# Altium PCB BOARD.PcbDoc
Units mm, origin at the board's own origin, x right, y up, seen from the top; angles counter-clockwise.
Board outline 15.75 x 25.91 mm, 2 copper layers (Top Layer, Bottom Layer); 4 components, 10 nets, 34 pads, 7 vias.
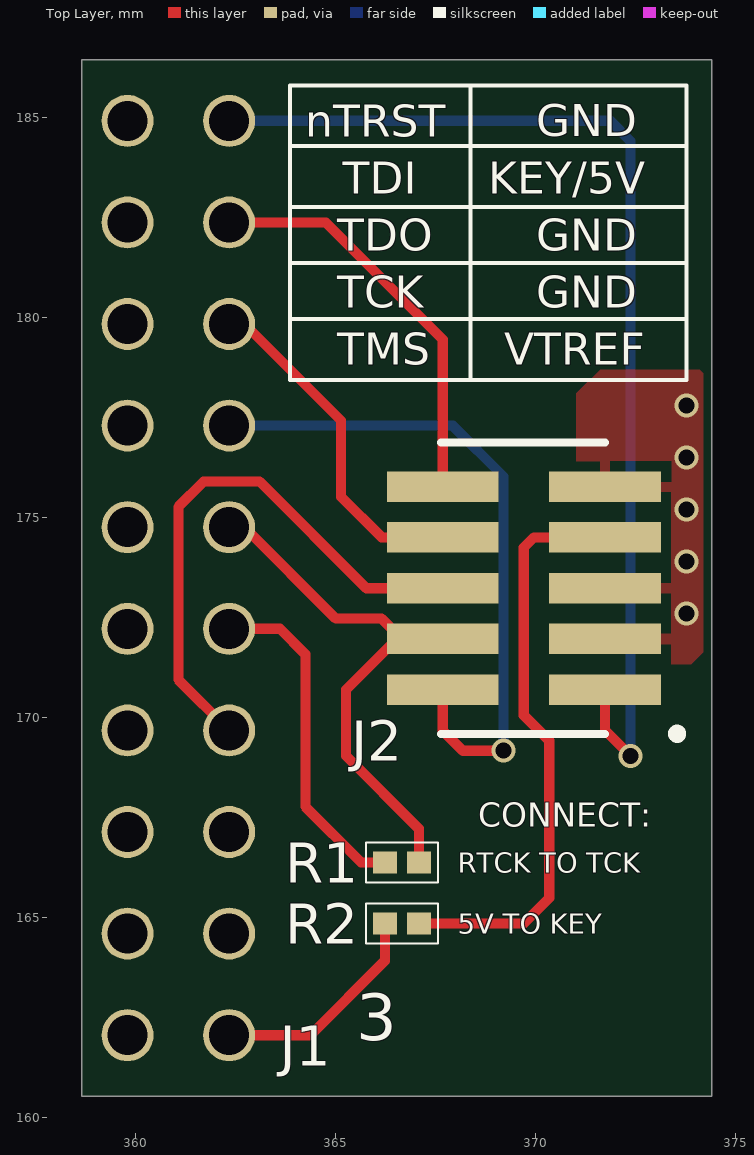
[diagram p0: Top Layer view]
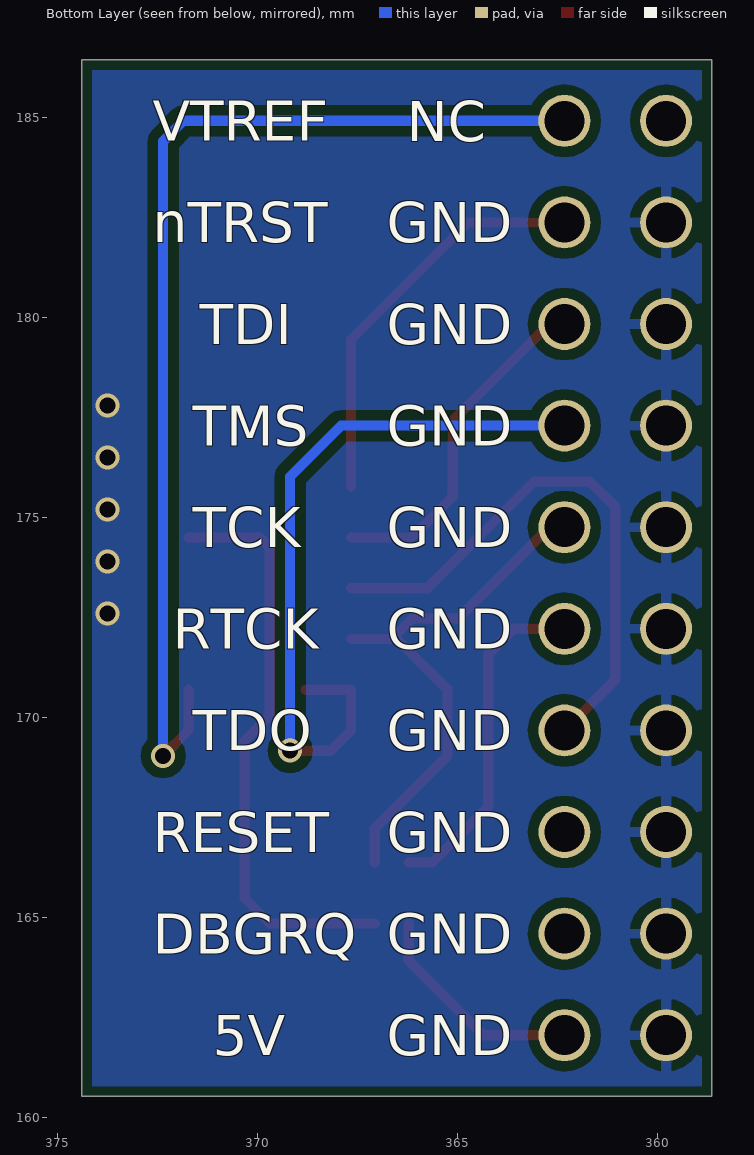
[diagram p1: Bottom Layer view, seen from below]
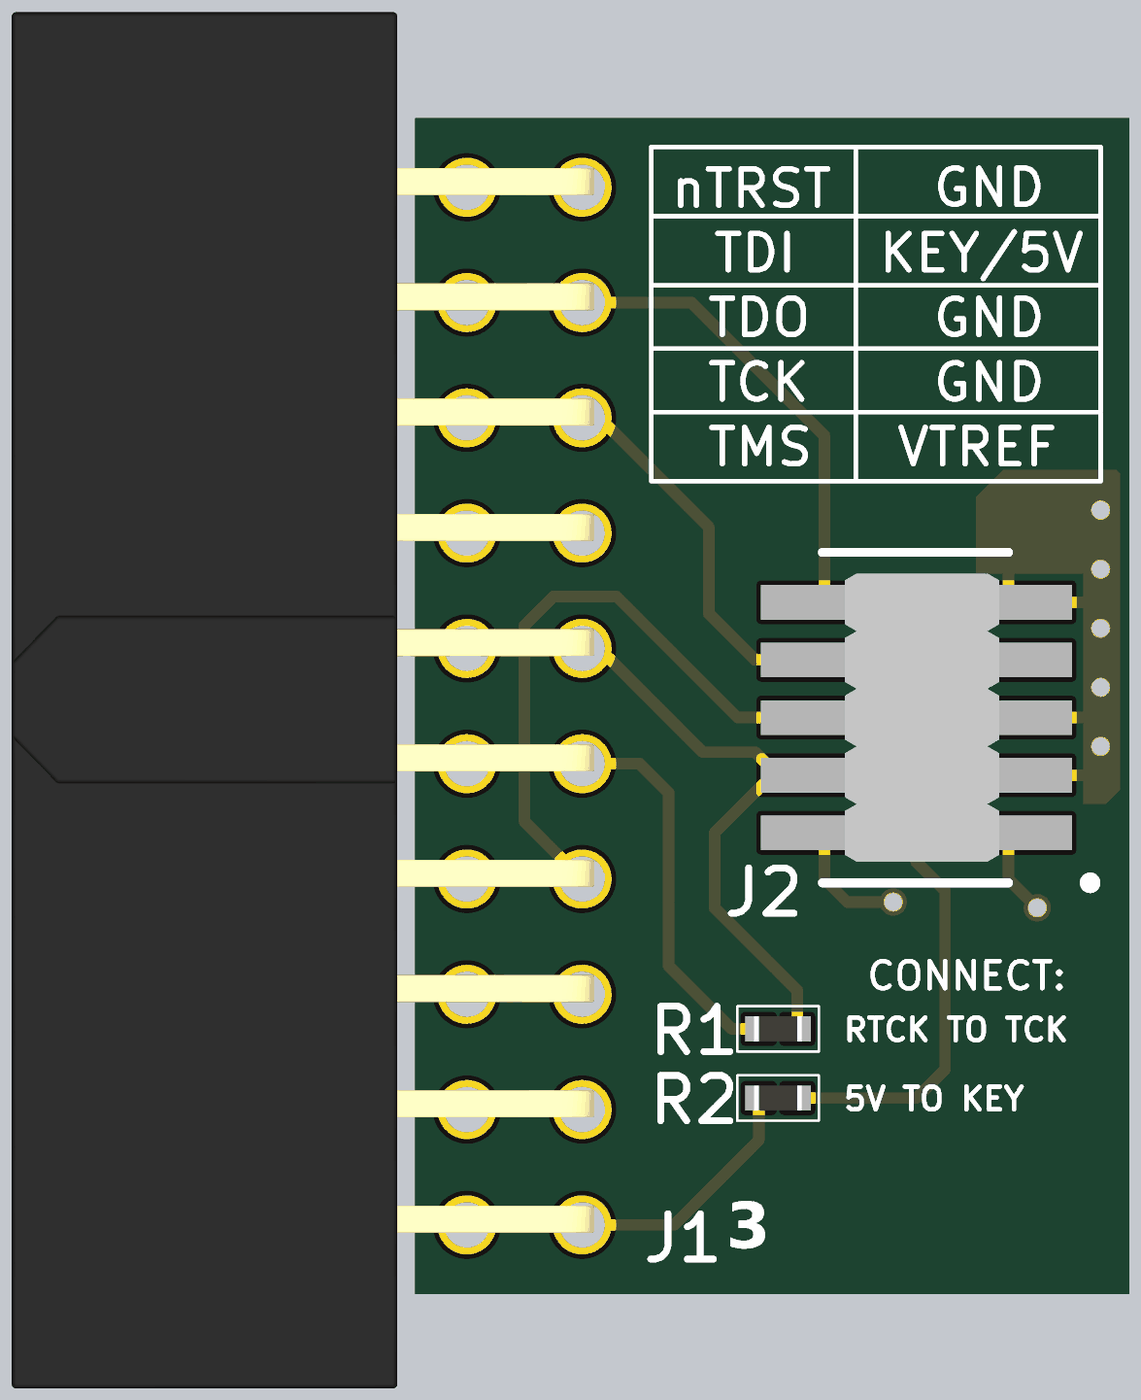
[diagram p2: 3D render of the assembled board from above, using the file's embedded part models]

## Layer stack, top to bottom
Top Solder: solder mask 0.0102, Solder Resist, Dk 3.5
Top Layer: signal copper 0.0356
Dielectric 1: dielectric 0.32, FR-4, Dk 4.8
Bottom Layer: signal copper 0.0356
Bottom Solder: solder mask 0.0102, Solder Resist, Dk 3.5

## Board outline
374.396,160.528 374.396,186.436 358.648,186.436 358.648,160.782 358.648,160.528

## Design rules (kind name [scope] priority, off if disabled: settings)
Clearance [All] p1: gap=0.254 ignorepadtopadclearanceinfootprint=TRUE except(0: Arc-Hole Track-Hole SMDPad-Hole THPad-Hole Via-Hole Fill-Hole Poly-Hole Region-Hole Text-Hole)
PolygonConnect PolygonConnect_1 [IsVia] p1: connectstyle=Direct reliefconductorwidth=0.254 reliefentries=4 polygonreliefangle="90 Angle" airgapwidth=0.254
PolygonConnect [All] p2: connectstyle=Relief reliefconductorwidth=0.254 reliefentries=4 polygonreliefangle="90 Angle" airgapwidth=0.254
RoutingVias [All] p1: holewidth=0.711 width=1.27 viastyle="Through Hole" minholewidth=0.711 minwidth=1.27 maxholewidth=0.711 maxwidth=1.27
SolderMaskExpansion [All] p1: expansion=0.102
Width [All] p1: maxlimit=0.254 minlimit=0.254 preferedwidth=0.254
30 further rules are at their usual default settings.

## Components (designator, comment, footprint, x,y, rotation, side; value= is the part's Value field where it differs from the comment)
J1 "SBH11-PBPC-D10-RA-BK" 20PIN_2.54 362.331,162.052 r270 top
J2 "20021121-00010C4LF" 10PIN_1.27 369.697,173.228 r270 top
R1 "0R" R0402 366.649,166.37 r180 top
R2 "0R" R0402 366.649,164.846 r180 top

## Footprints (in the part's own frame and the unit in brackets; to place one, negate y for a bottom-side part, rotate by r counter-clockwise, add the part's x,y. Pads: shape width x height; smd on the part's side, far side on the other; paste and mask are expansions set on the pad)
10PIN_1.27 [mil]
  rect 30x110 smd: 1(100,80) 2(100,-79.84) 3(50,80) 4(50,-79.84) 5(0,80) 6(0,-79.84) 7(-50,80) 8(-50,-79.84) 9(-100,80) 10(-100,-79.84)
  silkscreen extent -143,-81 147,155, body extent -125,-103 125,113, height 161
20PIN_2.54 [mm]
  round 1.3 hole 1: 1(-22.86,0) 2(-22.86,-2.54) 3(-20.32,0) 4(-20.32,-2.54) 5(-17.78,0) 6(-17.78,-2.54) 7(-15.24,0) 8(-15.24,-2.54) 9(-12.7,0) 10(-12.7,-2.54) 11(-10.16,0) 12(-10.16,-2.54) 13(-7.62,0) 14(-7.62,-2.54) 15(-5.08,0) 16(-5.08,-2.54) 17(-2.54,0) 18(-2.54,-2.54) 19(0,0) 20(0,-2.54)
  body extent -26.72,-12.57 3.6,0.27, height 7.1
R0402 [mm] "Chip Resistor, 2-Leads, Body 1.00x0.50mm, IPC Medium Density"
  rect 0.6x0.55 smd: 1(-0.425,0) 2(0.425,0)
  silkscreen extent -0.9,-0.5 0.9,0.5, body extent -0.53,-0.28 0.53,0.28, height 0.4

## Part data
J1: "CONN HEADR 2.54MM 20POS GOLD R/A", Color=Black, Manufacturer=Sullins, Package Quantity=1, Supplier Part Number 1=S9180-ND, Connector Type="Male Pin", Contact Plating=Gold, Lead Free="Lead Free", Manufacturer Part Number=SBH11-PBPC-D10-RA-BK, Mount="Through Hole", Number of Positions=20, Number of Rows=2, Packaging=Tray, Pitch=0.1inch, Pricing 1="1=0.83, 10=0.732, 100=0.6316, 500=0.5168, 1000=0.4594, 5000=0.4147 (USD)", Row Spacing=0.1inch, Stock 1=4652, Supplier 1=Digi-Key, Termination=Solder
J2: "10 Positions Header, Unshrouded Connector 0.050\" (1.27mm) Surface Mount Gold", Color=Black, Contact Resistance=30mR, Current Rating=1A, Insulation Resistance=100MR, Manufacturer="Amphenol FCI", Max Operating Temperature=85°C, Max Voltage Rating (AC)=125V, Min Operating Temperature=-40°C, Package Quantity=600, Supplier Part Number 1=609-3695-1-ND, ComponentLink1Description=https://www.verical.com/server-webapp/html/getDatasheet?partID=177140, ComponentLink1URL=https://www.verical.com/server-webapp/html/getDatasheet?partID=177140, ComponentLink2Description=http://portal.fciconnect.com/Comergent/fci/drawing/20021121.pdf, ComponentLink2URL=http://portal.fciconnect.com/Comergent/fci/drawing/20021121.pdf, ComponentLink3Description=https://media.digikey.com/pdf/Data%20Sheets/FCI%20PDFs/Minitek%20127_Catalog.pdf, ComponentLink3URL=https://media.digikey.com/pdf/Data%20Sheets/FCI%20PDFs/Minitek%20127_Catalog.pdf, ComponentLink4Description=http://portal.fciconnect.com/Comergent//fci/drawing/20021121.pdf, ComponentLink4URL=http://portal.fciconnect.com/Comergent//fci/drawing/20021121.pdf, Connector Type="Header,Male Pin", Contact Material="Copper,Copper Alloy,Gold", Contact Mating Length=0.12inch, Contact Plating=Gold, Depth=3.4mm, Gender=Male, Housing Color=Black, Housing Material=Thermoplastic, Length=6.35mm, Manufacturer Part Number=20021121-00010C4LF, Mating Post Length=3.05mm, Mount="Surface Mount", Number of Contacts=10, Number of Positions=10, Number of Rows=2, Orientation=Straight, Packaging="Tape and Reel", Pitch=1.27mm, Pricing 1="1=0.9, 10=0.797, 100=0.6951 (USD)", Radiation Hardening=No, REACH SVHC="No SVHC", Row Spacing=0.05inch, Stack Height=3mm, Stock 1=84330, Supplier 1=Digi-Key, Termination=Solder, Voltage Rating=125V
R1 R2: library part RC0402JR-070RL, "RES SMD 0 OHM 1/16W 0402", Case/Package=0402, Case Code (Metric)=1005, Manufacturer=Yageo, Max Operating Temperature=155°C, Max Power Dissipation=63mW, Min Operating Temperature=-55°C, Package Quantity=1, Power Rating=62.5mW, Resistance=0mR, Supplier Part Number 1=311-0.0JRCT-ND, Temperature Coefficient=200ppm/°C, Tolerance=5%, Voltage Rating=50V, Case Code (Imperial)=0402, Composition="Thick Film", Contact Plating=Matte,Tin, Depth=0.5mm, Features="Moisture Resistant", Height=0.016inch, Lead Free="Lead Free", Length=1mm, Manufacturer Part Number=RC0402JR-070RL, Military Standard=Not, Number of Terminations=2, Packaging="Tape and Reel", Pricing 1="1=0.1, 10=0.017, 25=0.0124, 50=0.0096, 100=0.007, 250=0.0054, 500=0.0043, 1000=0.0032, 5000=0.0023 (USD)", Radiation Hardening=No, REACH SVHC=Unknown, Stock 1=44333412, Supplier 1=Digi-Key, Termination=SMD/SMT, Width=0.02inch

## Via types
v1: diameter 0.6, hole 0.4, Top Layer to Bottom Layer, 7 vias

## Nets (pads, with @x,y where several pads share a name; then routed paths per layer and width w, separated by ;. In a path a pad name is that pad's centre, name@x,y a point inside that pad or via, vN(x,y) a via of type N, cw(c..) or ccw(c..) an arc to the next point about the centre after c; other vN are vias at no path point)
GND: J1.4 J1.6 J1.8 J1.10 J1.12 J1.14 J1.16 J1.18 J1.20 J2.3 J2.5 J2.9
  other v1: 373.761,172.593 373.761,173.895 373.761,175.196 373.761,176.498 373.761,177.8
NetJ1_11: J1.11 R1.2 | length 8.5
  Top Layer w0.254: J1.11 363.601,172.212 364.236,171.577 364.236,167.767 365.633,166.37 R1.2
NetJ1_19: J1.19 R2.2 | length 5.6
  Top Layer w0.254: J1.19 364.363,162.052 366.224,163.913 R2.2
NetJ2_7: J2.7 R2.1 | length 14.7
  Top Layer w0.254: R2.1 369.697,164.846 370.332,165.481 370.332,169.418 369.697,170.053 369.697,174.244 369.951,174.498 J2.7
nTRST: J1.3 J2.10 | length 10.2
  Top Layer w0.254: J1.3 364.744,182.372 367.669,179.447 J2.10
TCK: J1.9 J2.4 R1.1 | length 13.5
  Top Layer w0.254: J1.9 362.712,174.752 364.998,172.466 366.141,172.466 J2.4@366.649,171.958 ; R1.1 367.074,167.215 365.252,169.037 365.252,170.688 366.522,171.958 J2.4@366.649,171.958 ; J2.4 J2.4@366.649,171.958
TDI: J1.5 J2.8 | length 8.7
  Top Layer w0.254: J1.5 362.712,179.832 365.125,177.419 365.125,175.514 366.141,174.498 J2.8
TDO: J1.13 J2.6 | length 14.1
  Top Layer w0.254: J1.13 361.061,170.942 361.061,175.26 361.696,175.895 363.093,175.895 365.76,173.228 J2.6
TMS: J1.7 J2.2 | length 18.1
  Top Layer w0.254: J2.2@368.808,170.688 J2.2 367.669,169.668 368.173,169.164 v1(369.189,169.164)
  Bottom Layer w0.254: J1.7 367.919,177.292 369.189,176.022 v1(369.189,169.164)
VTref: J1.1 J2.1 | length 27.5
  Top Layer w0.254: J2.1 371.729,169.672 v1(372.364,169.037)
  Bottom Layer w0.254: J1.1 371.856,184.912 372.364,184.404 v1(372.364,169.037)
pads on no net: J1.2 J1.15 J1.17

## Polygon pours and split planes (outlines as drawn)
GND on Bottom Layer "GND" (solid, remove dead copper, pour order 0): 358.902,160.782 374.142,160.782 374.142,186.182 358.902,186.182
GND on Top Layer "GND" (solid, remove dead copper, pour order 2): 373.888,171.323 374.187,171.622 374.187,178.689 371.602,178.689 371.012,178.099 371.012,171.831 371.52,171.323

## Silkscreen, mask and mechanical layers (free items; w line width, h text height)
Top Overlay:
  lines w0.1: 363.855,179.959 373.761,179.959 ; 363.855,181.356 373.761,181.356 ; 363.855,182.753 373.761,182.753 ; 363.855,184.277 373.761,184.277 ; 368.363,178.435 368.363,185.801 ; 363.855,178.435 373.761,178.435 373.761,185.801 363.855,185.801 363.855,178.435
  text "GND" at 370.008,184.531 h0.8
  text "nTRST" at 364.236,184.512 h0.8
  text "TDI" at 365.169,183.088 h0.8
  text "KEY/5V" at 368.808,183.088 h0.8
  text "TDO" at 365.036,181.664 h0.8
  text "GND" at 370.008,181.664 h0.8
  text "TCK" at 365.036,180.24 h0.8
  text "GND" at 370.008,180.24 h0.8
  text "TMS" at 365.036,178.816 h0.8
  text "VTREF" at 369.208,178.816 h0.8
  text "CONNECT:" at 368.554,167.259 h0.6
  text "RTCK TO TCK" at 368.046,166.116 h0.5
  text "5V TO KEY" at 368.046,164.592 h0.5
  text "3" at 365.506,161.544 h2
Bottom Overlay:
  text "NC" at 366.268,184.404 h1
  text "VTREF" at 372.618,184.412 h1
  text "GND" at 366.776,181.872 h1
  text "nTRST" at 372.618,181.872 h1
  text "GND" at 366.776,179.332 h1
  text "TDI" at 371.452,179.332 h1
  text "GND" at 366.776,176.792 h1
  text "TMS" at 371.618,176.792 h1
  text "GND" at 366.776,174.252 h1
  text "TCK" at 371.618,174.252 h1
  text "GND" at 366.776,171.712 h1
  text "RTCK" at 372.118,171.712 h1
  text "GND" at 366.776,169.172 h1
  text "TDO" at 371.618,169.172 h1
  text "GND" at 366.776,166.632 h1
  text "RESET" at 372.618,166.632 h1
  text "GND" at 366.776,164.092 h1
  text "DBGRQ" at 372.618,164.092 h1
  text "GND" at 366.776,161.552 h1
  text "5V" at 371.118,161.552 h1
Mechanical 1:
  lines w0.1: 358.648,160.528 358.648,186.436 374.396,186.436 374.396,160.528 358.648,160.528